# Altium PCB pbc_benelli.PcbDoc
Units mil, origin at the board's own origin, x right, y up, seen from the top; angles counter-clockwise.
Board outline 3325 x 3880 mil, 2 copper layers (Top Layer, Bottom Layer); 45 components, 39 nets, 172 pads, 13 vias.
Unrouted connection lines stored in the file: 1.
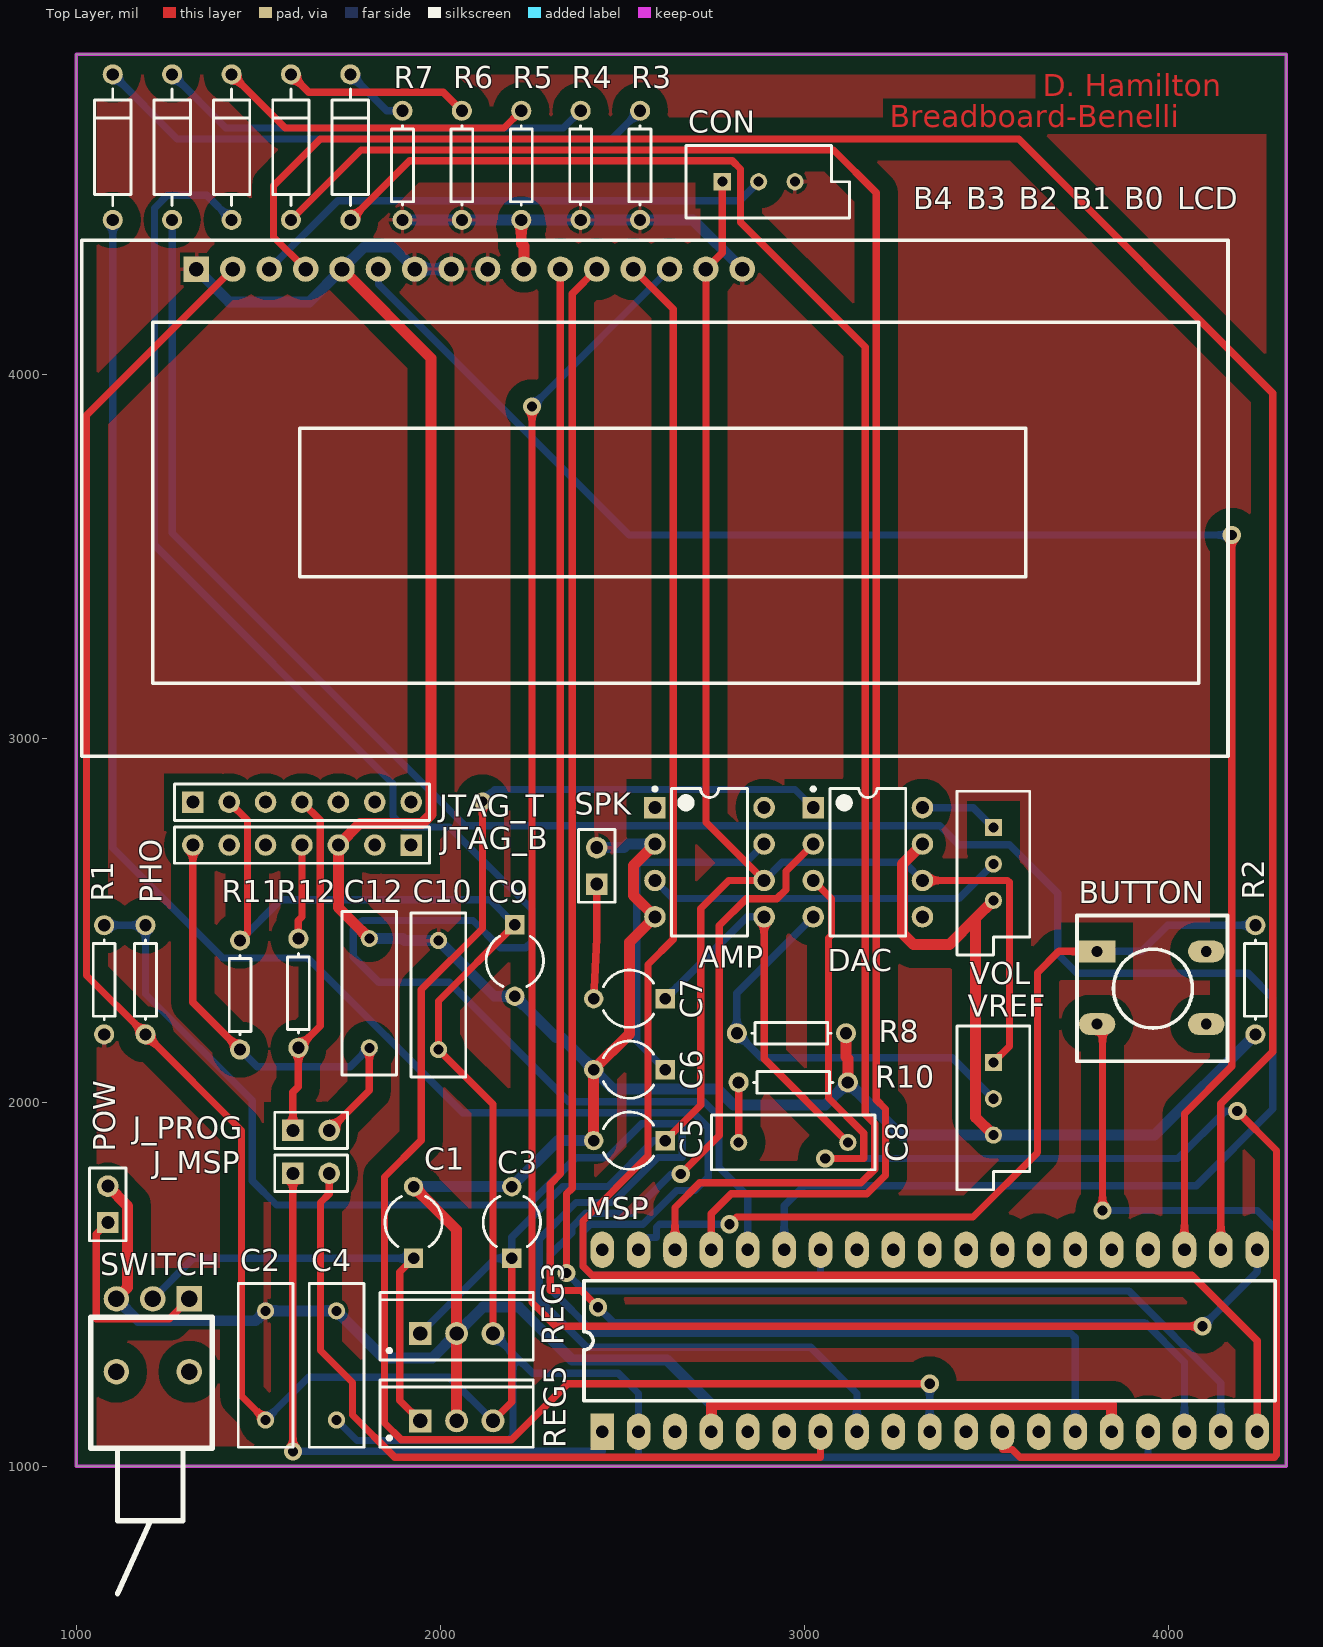
[diagram p0: Top Layer view]
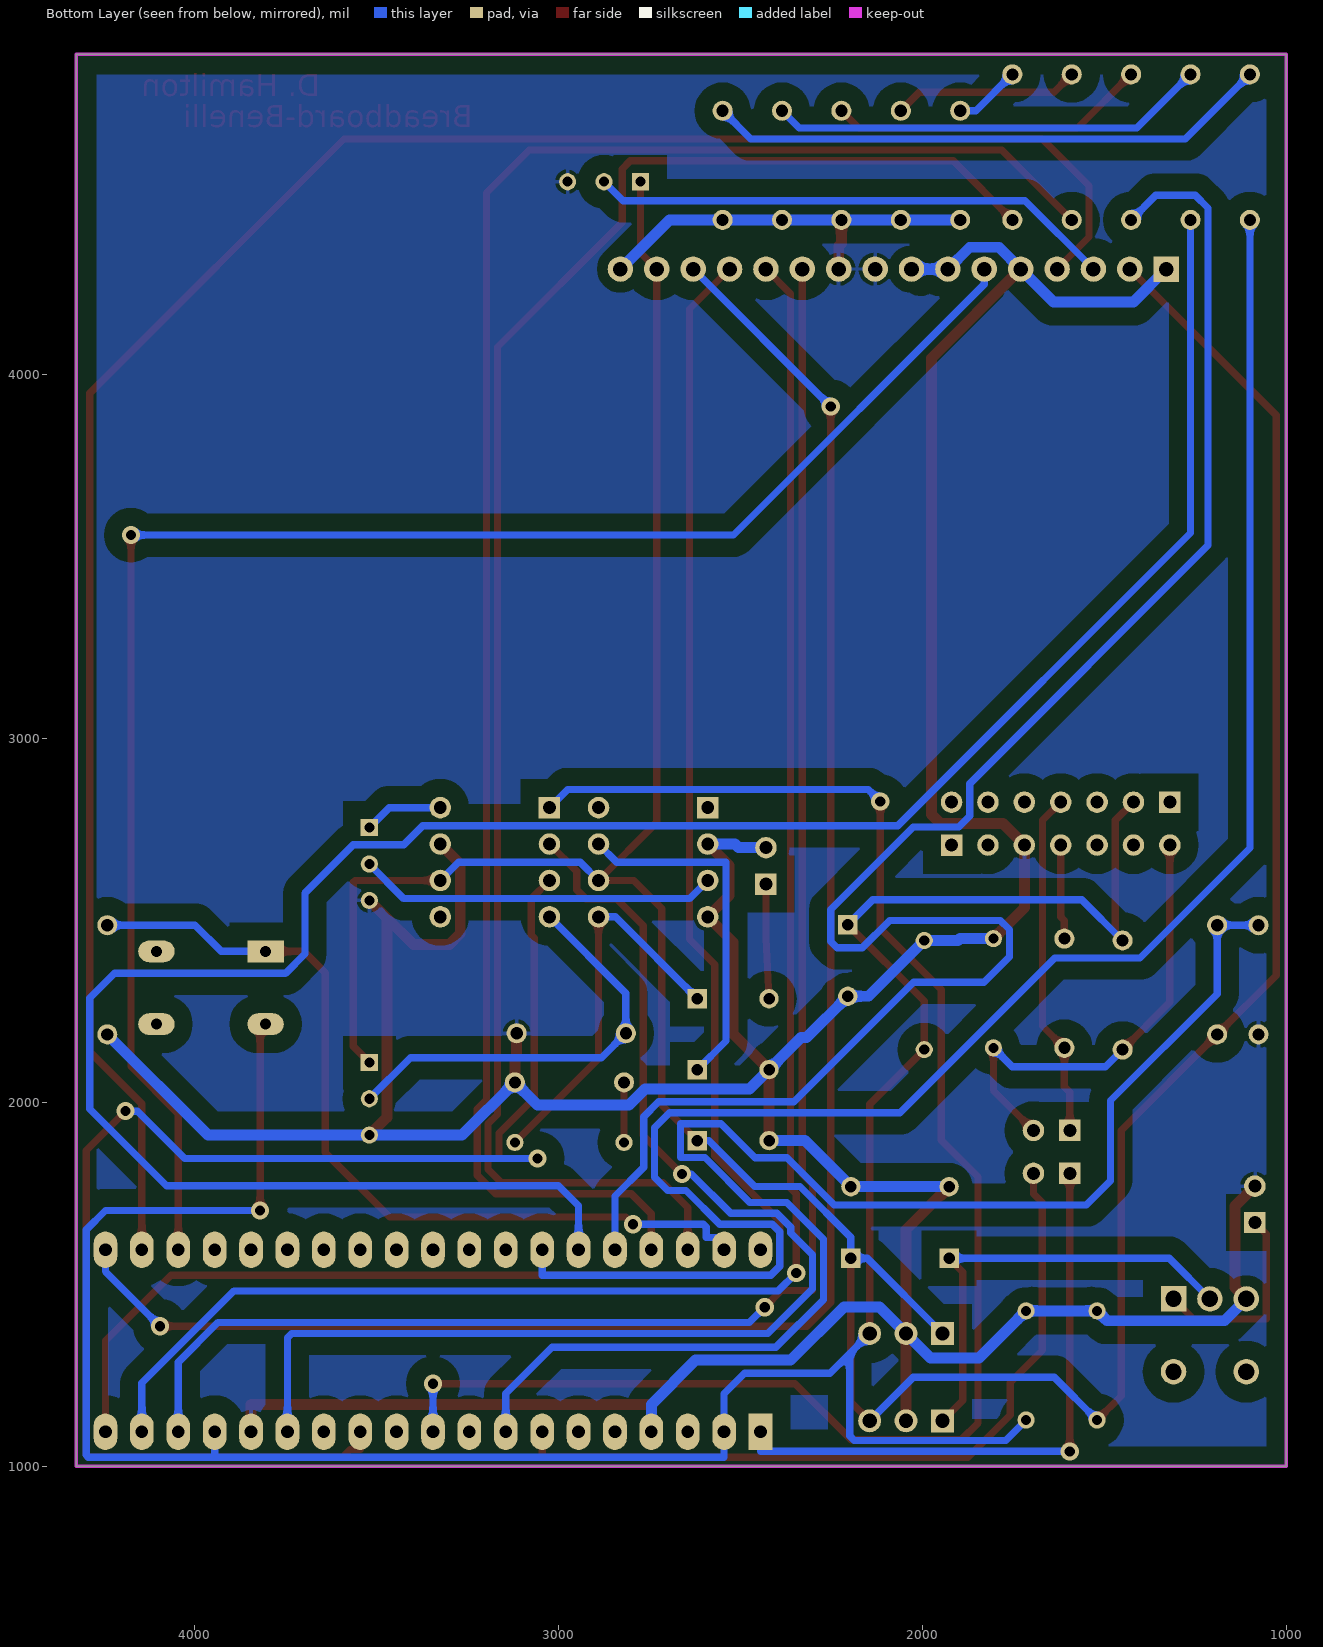
[diagram p1: Bottom Layer view, seen from below]

## Layer stack, top to bottom
Top Solder: solder mask 0.4, Solder Resist, Dk 3.5
Top Layer: signal copper 1.4
Dielectric 1: dielectric 12.6, FR-4, Dk 4.8
Bottom Layer: signal copper 1.4
Bottom Solder: solder mask 0.4, Solder Resist, Dk 3.5

## Board outline
1000,1000 1000,4880 4325,4880 4325,1000

## Design rules (kind name [scope] priority, off if disabled: settings)
Clearance [All] p1: gap=10 ignorepadtopadclearanceinfootprint=FALSE except(0: Arc-Hole Track-Hole SMDPad-Hole THPad-Hole Via-Hole Fill-Hole Poly-Hole Region-Hole Text-Hole; 50: Arc-Fill Arc-Poly Arc-Region Track-Fill Track-Poly Track-Region SMDPad-Fill SMDPad-Poly SMDPad-Region THPad-Fill THPad-Poly THPad-Region Via-Fill Via-Poly Via-Region Fill-Fill Fill-Poly Fill-Region Poly-Poly Poly-Region Region-Region)
PolygonConnect [All] p1: connectstyle=Relief reliefconductorwidth=10 reliefentries=4 polygonreliefangle="90 Angle" airgapwidth=10
RoutingVias [All] p1: holewidth=28 width=50 viastyle="Through Hole" minholewidth=28 minwidth=50 maxholewidth=28 maxwidth=50
SolderMaskExpansion [All] p1: expansion=4
Width "Schematic Width Constraint" [InNet('GND')] p1: maxlimit=30 minlimit=30 preferedwidth=30 minimp=50.000000 maximp=50.000000 favimp=50.000000
Width [All] p2: maxlimit=20 minlimit=20 preferedwidth=20 minimp=50.000000 maximp=50.000000 favimp=50.000000
30 further rules are at their usual default settings.

## Components (designator, comment, footprint, x,y, rotation, side; value= is the part's Value field where it differs from the comment)
AMP "LM386N-1" DIP-8 2740,2660 r0 top
B0 "LED1" DIODE-0.4 1752.92,4625 r90 top
B1 "LED1" DIODE-0.4 1589.69,4625 r90 top
B2 "LED1" DIODE-0.4 1426.46,4625 r90 top
B3 "LED1" DIODE-0.4 1263.23,4625 r90 top
B4 "LED1" DIODE-0.4 1100,4625 r90 top
BUTTON "SW-PB" "SW PB" 3805,2415 r0 top
C1 "Cap Pol2" CAPR5-4X5 1926.62,1670 r90 top value=33uF
C2 "Cap" RAD-0.3 1520,1277.17 r270 top value=.33uF
C3 "Cap Pol2" CAPR5-4X5 2196.62,1670 r90 top value=33uF
C4 "Cap" RAD-0.3 1715,1277.17 r270 top value=.33uF
C5 "Cap Pol2" CAPR5-4X5 2520,1895 r180 top value=100uF
C6 "Cap Pol2" CAPR5-4X5 2520,2090 r180 top value=100uF
C7 "Cap Pol2" CAPR5-4X5 2520,2285 r180 top value=220uF
C8 "Cap" RAD-0.3 2970,1890 r0 top value=100nF
C9 "Cap Pol2" CAPR5-4X5 2205,2390 r270 top value="10 uF"
C10 "Cap" RAD-0.3 1995,2295 r90 top value=".1 uF"
C12 "Cap" RAD-0.3 1805,2300 r90 top value=2.2nF
CON "RPot_3" VR5 2875,4530 r0 top value=10K
DAC "LT1661" DIP-8 3175,2660 r0 top
J_MSP "Header 2" HDR1X2 1595,1805 r0 top
J_PROG "Header 2" HDR1X2 1595,1922.88 r0 top
JTAG_B "Header 7" HDR1X7 1920,2707.12 r180 top
JTAG_T "Header 7" HDR1X7 1320,2825 r0 top
LCD "LCD 44780" "OLED 16x2" 1330,4290 r0 top
MSP "MSP430F2272-DA38" DIP38 2445,1095 r90 top
PHO "Res1" AXIAL-0.3 1190,2336.87 r90 top
POW "Header 2" HDR1X2 1086.44,1669.94 r90 top
R1 "Res1" AXIAL-0.3 1076.46,2336.87 r90 top value=1K
R2 "Res1" AXIAL-0.3 4240,2336.87 r270 top value=100
R3 "Res1" AXIAL-0.3 2549.06,4575 r270 top value=910
R4 "Res1" AXIAL-0.3 2385.84,4575 r270 top value=910
R5 "Res1" AXIAL-0.3 2222.61,4575 r270 top value=910
R6 "Res1" AXIAL-0.3 2059.38,4575 r270 top value=910
R7 "Res1" AXIAL-0.3 1896.15,4575 r270 top value=910
R8 "Res1" AXIAL-0.3 2965,2190 r180 top value=1K
R10 "Res1" AXIAL-0.3 2970,2055 r180 top value=15
R11 "Res1" AXIAL-0.3 1450,2295 r270 top value=47K
R12 "Res1" AXIAL-0.3 1610,2300 r90 top value=330
REG3 "LM3940-3.3" T03B 2045,1365 r0 top
REG5 "LM2940-5.0" T03B 2045,1125 r0 top
SPK "Header 2" HDR1X2 2430,2600 r90 top
SWITCH "SW-SPDT" "SW DPST jameco" 1212.36,1461.89 r0 top
VOL "RPot_3" VR5 3520,2655 r270 top value=10K
VREF "RPot_3" VR5 3520,2010 r270 top value=10K

## Footprints (in the part's own frame and the unit in brackets; to place one, negate y for a bottom-side part, rotate by r counter-clockwise, add the part's x,y. Pads: shape width x height; smd on the part's side, far side on the other; paste and mask are expansions set on the pad)
AXIAL-0.3 [mm] "Axial Device, Thru-Hole; 2 Leads; 0.3 in Pin Spacing"
  round 1.4 hole 0.85: 1(-3.81,0) 2(3.81,0)
  silkscreen extent -2.77,-0.76 2.77,0.76
CAPR5-4X5 [mm] "Capacitor; 2 Leads"
  rect 1.35x1.35 hole 0.8: 1(-2.5,0)
  round 1.35 hole 0.8: 2(2.5,0)
  silkscreen extent -1.69,-2 1.82,2
DIODE-0.4 [mm] "Diode, Thru-Hole; 2 Leads; 0.4 in Pin Spacing"
  round 1.4 hole 0.85: 1(-5.08,0) 2(5.08,0)
  silkscreen extent -4.06,-1.27 4.06,1.27
DIP38 [mil]
  rect 100x65 hole 35: 1(0,0)
  oval 100x65 hole 35: 2(0,-100) 3(0,-200) 4(0,-300) 5(0,-400) 6(0,-500) 7(0,-600) 8(0,-700) 9(0,-800) 10(0,-900) 11(0,-1000) 12(0,-1100) 13(0,-1200) 14(0,-1300) 15(0,-1400) 16(0,-1500) 17(0,-1600) 18(0,-1700) 19(0,-1800) 20(500,-1800) 21(500,-1700) 22(500,-1600) 23(500,-1500) 24(500,-1400) 25(500,-1300) 26(500,-1200) 27(500,-1100) 28(500,-1000) 29(500,-900) 30(500,-800) 31(500,-700) 32(500,-600) 33(500,-500) 34(500,-400) 35(500,-300) 36(500,-200) 37(500,-100) 38(500,0)
  silkscreen extent 85,-1850 415,50
DIP-8 [mm] "DIP; 8 Leads; Row Spacing 7.62 mm; Pitch 2.54 mm"
  rect 1.5x1.5 hole 0.9: 1(-3.81,3.81)
  round 1.5 hole 0.9: 2(-3.81,1.27) 3(-3.81,-1.27) 4(-3.81,-3.81) 5(3.81,-3.81) 6(3.81,-1.27) 7(3.81,1.27) 8(3.81,3.81)
  silkscreen extent -3.93,-5.15 2.65,5.23, body extent -3.6,-5.15 3.6,5.15, height 5.08
HDR1X2 [mm] "Connector; Header; 2 Position"
  rect 1.5x1.5 hole 0.9: 1(0,0)
  round 1.5 hole 0.9: 2(2.54,0)
  silkscreen extent -1.27,-1.27 3.81,1.27
HDR1X7 [mm] "Connector; Header; 7 Position"
  rect 1.5x1.5 hole 0.9: 1(0,0)
  round 1.5 hole 0.9: 2(2.54,0) 3(5.08,0) 4(7.62,0) 5(10.16,0) 6(12.7,0) 7(15.24,0)
  silkscreen extent -1.27,-1.27 16.51,1.27
"OLED 16x2" [mil]
  rect 70x70 hole 40: 1(0,0)
  round 70 hole 40: 2(100,0) 3(200,0) 4(300,0) 5(400,0) 6(500,0) 7(600,0) 8(700,0) 9(800,0) 10(900,0) 11(1000,0) 12(1100,0) 13(1200,0) 14(1300,0) 15(1400,0) 16(1500,0)
  silkscreen extent -315,-1339 2835,79
RAD-0.3 [mm] "Radial Cap, Thru-Hole; 2 Leads; 0.3 in Pin Spacing"
  round 1.2 hole 0.7: 1(-3.81,0) 2(3.81,0)
  silkscreen extent -5.72,-1.91 5.71,1.91
"SW DPST jameco" [mil]
  rect 70x70 hole 45: 1(97.64,-1.89)
  round 70 hole 45: 2(-2.36,-1.89) 3(-102.36,-1.89) 4(-102.36,-201.89) 5(97.64,-201.89)
  silkscreen extent -172,-812 162,-52
"SW PB" [mil]
  rect 100x60 hole 30: 1(0,0)
  oval 100x60 hole 30: 2(0,-200) 3(300,-200) 4(300,0)
  silkscreen extent -55,-302 358,98
T03B [mm]
  rect 1.6x1.6 hole 1: 1(-2.54,0)
  round 1.6 hole 1: 2(0,0) 3(2.54,0)
  silkscreen extent -5.35,-1.85 5.35,2.85, body extent -5.4,-1.9 5.4,2.9, height 19.4
VR5 [mm] "Thru-Hole; 3 Leads"
  rect 1.2x1.2 hole 0.7: 1(-2.54,0)
  round 1.2 hole 0.7: 2(0,0) 3(2.54,0)
  silkscreen extent -5.08,-2.54 6.35,2.54

## Part data
AMP: "Low-Voltage Audio Power Amplifier", PackageDocument=Sep-1997, DatasheetDocument=Sep-1997, PackageReference=N08E, Published=15-Apr-2002, Publisher="Altium Limited"
B0 B1 B2 B3 B4: "Typical RED GaAs LED", LatestRevisionDate=08-Jul-2005, LatestRevisionNote="Mech Layer 1 removed.", PackageDescription="LED; 2 Leads", PackageReference=LED-1, Published=8-Jun-2000, Publisher="Altium Limited"
BUTTON: "DIGIKEY SW400-ND", LatestRevisionDate=17-Jul-2002, LatestRevisionNote="Re-released for DXP Platform.", Published=24-Mar-1999, Publisher="Altium Limited"
C1 C3 C5 C6 C7 C9: "Polarized Capacitor (Axial)", LatestRevisionDate=17-Jul-2002, LatestRevisionNote="Re-released for DXP Platform.", PackageDescription="Polarized Capacitor; 2 Leads", PackageReference=POLAR0.8, Published=8-Jun-2000, Publisher="Altium Limited"
C2 C4 C8 C10 C12: "Capacitor", LatestRevisionDate=17-Jul-2002, LatestRevisionNote="Re-released for DXP Platform.", PackageDescription="Radial Cap, Thru-Hole; 2 Leads; 0.3 in Pin Spacing", PackageReference=RAD-0.3, Published=8-Jun-2000, Publisher="Altium Limited"
CON VOL VREF: library part RPot, "Potentiometer", LatestRevisionDate=17-Jul-2002, LatestRevisionNote="Re-released for DXP Platform.", Published=8-Jun-2000, Publisher="Altium Limited", Set Position=0.5, Sim Note="Enter the Resistance value and the set point into parameter fields."
J_MSP J_PROG POW SPK: "Header, 2-Pin", LatestRevisionDate=17-Jul-2002, LatestRevisionNote="Re-released for DXP Platform.", Publisher="Altium Limited"
JTAG_B JTAG_T: "Header, 7-Pin", LatestRevisionDate=17-Jul-2002, LatestRevisionNote="Re-released for DXP Platform.", Publisher="Altium Limited"
MSP: library part MSP430F22x2-DA38, Supplier Part Number 1=296-21456-1-ND, Supplier 1=Digi-Key
PHO R1 R2 R3 R4 R5 R6 R7 R8 R10 R11 R12: "Resistor", LatestRevisionDate=17-Jul-2002, LatestRevisionNote="Re-released for DXP Platform.", PackageDescription="Axial Device, Thru-Hole; 2 Leads; 0.3 in Pin Spacing", PackageReference=AXIAL-0.3, Published=8-Jun-2000, Publisher="Altium Limited"
REG3 REG5: library part LM2940CT-5.0, "1A Low Dropout Regulator, 3-pin TO-220", Manufacturer="National Semiconductor", PackageTopMarking="NSUZXYTTE#*LM2940CT*-5.0 P+", PartNumber=LM2940CT-3.3, PowerWise=N, ComponentLink1Description="Manufacturer URL", ComponentLink1URL=http://www.national.com/, ComponentLink2Description="LM2940C Datasheet", ComponentLink2URL=http://www.national.com/ds/LM/LM2940C.pdf, ComponentLink3Description="LM2940C Web Page", ComponentLink3URL=http://www.national.com/pf/LM/LM2940C.html, ComponentLink4Description="T03B Package Page", ComponentLink4URL=http://www.national.com/packaging/folders/t03b.html, CompType="LDO IC", DatasheetVersion=Jan-2007, High-Reliability=Y, PackageDescription="TO-220, Molded, 3 Lead, Straight", PackageReference=T03B, PackageVersion="revL, Jan-1992", PinCount=3, RoHS=N
SWITCH: "SPDT Subminiature Toggle Switch, Right Angle Mounting, Vertical Actuation", ComponentLink1Description="Manufacturer Link", ComponentLink1URL=http://www.apem.com, DatasheetVersion=05-Dec-2000, LatestRevisionDate=17-Dec-2003, LatestRevisionNote="Schematic revised, PCB Footprint replaced.", PackageDescription="Switch; 4 Leads", PackageReference=TL36WW15050, Published=24-Mar-1999, Publisher="Altium Limited"

## Via types
v1: diameter 50, hole 28, Top Layer to Bottom Layer, 13 vias

## Nets (pads, with @x,y where several pads share a name; then routed paths per layer and width w, separated by ;. In a path a pad name is that pad's centre, name@x,y a point inside that pad or via, vN(x,y) a via of type N, cw(c..) or ccw(c..) an arc to the next point about the centre after c; other vN are vias at no path point)
3V3: BUTTON.2 C4.2 C9.1 C10.1 JTAG_T.2 MSP.2 MSP.16 R11.1 REG3.3 | length 7365.8
  Top Layer w20: JTAG_T.2 1470,2775 1470,2465 R11.1 ; REG3.3 2145,1995 C10.1 1995,2278.43 C9.1 ; BUTTON.2 3820,2215 v1(3820,1703)
  Bottom Layer w20: R11.1 1562,2557 2136.43,2557 C9.1 ; C4.2 1771.17,1071 2187,1071 2200,1084 2200,1310 ; REG3.3 2200,1310 ; v1(3820,1703) 4245,1703 4298,1650 4298,1031 4292,1025 3945,1025 ; MSP.16 3945,1025 ; 2200,1310 2254,1256 2489,1256 2545,1200 MSP.2 2545,1025 3945,1025
+5V: AMP.6 C2.2 C3.1 C5.1 CON.1 DAC.6 LCD.2 LCD.15 PHO.1 REG3.1 REG5.3 VREF.1 | length 9771.2
  Top Layer w20: LCD.2 1028,3888 1028,2348.87 PHO.1 1454,1922.87 1454,1193.17 C2.2 ; REG5.3 2196.62,1176.62 C3.1 ; C5.1 2716,1992.57 2716,2532.9 2793.1,2610 AMP.6 2730,2770 LCD.15 2775,4335 CON.1 ; DAC.6 3559,2610 3564,2605 3564,2154 VREF.1
  Bottom Layer w20: C2.2 1637.83,1245 2025,1245 REG5.3 ; REG3.1 2151.57,1571.57 C3.1 2196.62,1629.13 2336.51,1769.01 2461.01,1769.01 2587,1895 C5.1 ; AMP.6 2940,2660 3275,2660 DAC.6
+9V: POW.1 SWITCH.1 | length 555.7
  Top Layer w20: POW.1 1055,1638.5 1055,1405 1255,1405 SWITCH.1
GND: AMP.2 AMP.4 C1.2 C2.1 C3.2 C4.1 C5.2 C6.2 C9.2 C10.2 C12.2 CON.3 DAC.7 JTAG_B.3 LCD.1 LCD.5 LCD.7 LCD.8 LCD.9 LCD.10 LCD.16 MSP.4 MSP.15 POW.2 R1.1 R2.2 R3.2 R4.2 R5.2 R6.2 R7.2 R8.1 R10.1 REG3.2 REG5.2 SPK.2 SWITCH.3 VOL.3 VREF.3 | length 14195.7
  Top Layer w30: POW.2 1141,1715.38 1141,1491 SWITCH.3 ; LCD.5 1975,4045 1975,2791 1950,2766 1778.88,2766 JTAG_B.3 1720,2535 C12.2 ; C1.2 2045,1650.05 REG3.2 REG5.2 ; R5.2 2222.61,4360.39 2230,4353 LCD.10 ; C5.2 C6.2 2520,2188.43 2520,2440 AMP.4 2531,2569 2531,2651 AMP.2 ; MSP.4 2745,1170 3845,1170 MSP.15 ; R8.1 3115,2125 3120,2120 R10.1 ; DAC.7 3270,2655 3270,2464 3300,2434 3399,2434 3471,2506 ; VREF.3 3471,1959 3471,2506 ; VOL.3 3471,2506
  Bottom Layer w30: SWITCH.3 1170,1400 1492.83,1400 C2.1 C4.1 1844.17,1298 1978,1298 REG3.2 2118,1438 2215.83,1438 2362.02,1291.82 2623.18,1291.82 2745,1170 MSP.4 ; LCD.1 1420,4200 1640,4200 LCD.5 1790,4350 1870,4350 LCD.7 LCD.8 ; C12.2 1897,2450 1902,2445 C10.2 2148.43,2291.57 C9.2 2318.21,2178.36 2333.21,2178.36 C6.2 2475,2036.58 2762.42,2036.58 2806,1993 3058,1993 R10.1 3265,1910 VREF.3 3963.13,1910 R2.2 ; R7.2 R6.2 R5.2 R4.2 R3.2 2695,4425 LCD.16 ; C1.2 C3.2 2323.2,1895 C5.2 ; SPK.2 2505,2700 2515,2710 AMP.2
NetAMP_3: AMP.3 VOL.2 | length 990.1
  Bottom Layer w20: AMP.3 2640,2560 3425,2560 VOL.2
NetAMP_5: AMP.5 C7.1 C8.2 | length 1080
  Top Layer w20: AMP.5 2890,2120 C8.2
  Bottom Layer w20: C7.1 2843.43,2510 AMP.5
NetAMP_7: AMP.7 C6.1 | length 973.2
  Bottom Layer w20: C6.1 2540,2168.43 2540,2660 2840,2660 AMP.7
NetB0_1: B0.1 MSP.36 | length 4758.4
  Top Layer w20: B0.1 1915.36,4587.44 2802.56,4587.44 2825,4565 2825,4419 3168,4076 3168,1966.94 3193.62,1941.32 3193.62,1816.38 3156.45,1779.2 2713.02,1779.2 2645,1711.18 MSP.36
NetB0_2: B0.2 R7.1 | length 184.7
  Bottom Layer w20: B0.2 1852.92,4725 R7.1
NetB1_1: B1.1 MSP.35 | length 5068.8
  Top Layer w20: B1.1 1782.13,4617.44 3080.56,4617.44 3198,4500 3198,2007.31 3223.62,1981.69 3223.62,1800 3172.62,1749 2800,1749 2745,1694 MSP.35
NetB1_2: B1.2 R6.1 | length 511.1
  Top Layer w20: B1.2 1638.69,4776 2008.38,4776 R6.1
NetB2_1: B2.1 MSP.34 | length 4972.7
  Bottom Layer w20: B2.1 1358.46,4493 1250,4493 1215,4458 1215,3531 1870,2876 1870,2787 1900,2757 2025,2757 2252,2530 2252,2442 2235,2425 2165,2425 2090,2500 1786,2500 1761,2475 1761,2400 1831,2330 2024.37,2330 2352.79,2001.58 2725,2001.58 2766.09,1960.49 2766.09,1821.91 2845,1743 MSP.34
NetB2_2: B2.2 R5.1 | length 877
  Top Layer w20: B2.2 1574.02,4677.44 2175.05,4677.44 R5.1
NetB3_1: B3.1 MSP.33 | length 6391.3
  Bottom Layer w20: B3.1 1263.23,3564.77 2068,2760 3373,2760 3425,2708 3564,2708 3697,2575 3697,2408 3750,2355 4220,2355 4288,2287 4288,1981.88 4077.12,1771 3000,1771 2945,1716 MSP.33
NetB3_2: B3.2 R4.1 | length 1203.4
  Bottom Layer w20: B3.2 1410.79,4677.44 2338.28,4677.44 R4.1
NetB4_1: B4.1 MSP.32 | length 5050.7
  Bottom Layer w20: B4.1 1100,2699 1402,2397 1636,2397 2061.42,1971.58 2695,1971.58 2736.09,1930.49 2736.09,1794.09 2700,1758 2649.95,1758 2556.95,1665 2412.5,1665 2392,1644.5 2392,1550 2417,1525 3045,1525 MSP.32
NetB4_2: B4.2 R3.1 | length 1554.7
  Bottom Layer w20: B4.2 1277.56,4647.44 2471.5,4647.44 R3.1
NetBUTTON_1: BUTTON.1 MSP.37 R2.1 | length 2390
  Top Layer w20: v1(2795,1665) 2815,1685 3464,1685 3641,1862 3641,2356 3700,2415 BUTTON.1
  Bottom Layer w20: MSP.37 2545,1629 2594,1629 2594,1656.82 2602.18,1665 v1(2795,1665) ; BUTTON.1 3927,2415 3998.87,2486.87 R2.1
NetC1_1: C1.1 REG5.1 SWITCH.2 | length 1248.2
  Top Layer w20: C1.1 1889,1533.95 1889,1181 REG5.1
  Bottom Layer w20: SWITCH.2 1321.57,1571.57 C1.1
NetC7_2: C7.2 SPK.1 | length 315.2
  Top Layer w20: C7.2 2430,2451.43 SPK.1
NetC8_1: C8.1 R10.2 | length 165
  Top Layer w20: C8.1 R10.2
NetCON_2: CON.2 LCD.3 | length 1444.4
  Bottom Layer w20: LCD.3 1718,4478 2823,4478 CON.2
NetDAC_4: DAC.4 R8.2 VREF.2 | length 1186.5
  Bottom Layer w20: DAC.4 2815,2300 R8.2 2882,2123 3407,2123 VREF.2
NetDAC_8: DAC.8 VOL.1 | length 217.8
  Bottom Layer w20: DAC.8 3465,2810 VOL.1
NetJTAG_B_4: JTAG_B.4 R12.2 | length 261.3
  Top Layer w20: R12.2 1610,2500 1620,2510 JTAG_B.4
NetLCD_4: LCD.4 MSP.21 | length 5767.2
  Top Layer w20: LCD.4 1542,4378 1542,4519 1670.44,4647.44 3589.56,4647.44 4288,3949 4288,2139 4145,1996 MSP.21
NetLCD_6: LCD.6 MSP.22 | length 4690.2
  Top Layer w20: MSP.22 4045,1969 4175,2099 v1(4175,3559)
  Bottom Layer w20: LCD.6 1830,4248 2519,3559 v1(4175,3559)
NetLCD_11: LCD.11 MSP.17 | length 4834.3
  Top Layer w20: LCD.11 2330,1803 2302,1775 2302,1482.82 2387.62,1482.82 v1(2433.44,1437)
  Bottom Layer w20: v1(2433.44,1437) 2475,1395.44 3935.56,1395.44 4045,1286 MSP.17
NetLCD_12: LCD.12 MSP.18 | length 4850.5
  Top Layer w20: v1(2347,1531) 2347,1748.8 2362.5,1764.3 2362.5,4222.5 LCD.12
  Bottom Layer w20: v1(2347,1531) 2396,1482 3892,1482 4145,1229 MSP.18
NetLCD_13: LCD.13 MSP.19 | length 5076.2
  Top Layer w20: LCD.13 2640,4180 2640,2448 2571,2379 2571,1853 2392,1674 2392,1550 2417,1525 4065,1525 4245,1345 MSP.19
NetLCD_14: LCD.14 MSP.20 | length 5138.6
  Top Layer w20: v1(2252,3912) 2252,1450 2317,1385 v1(4095,1385)
  Bottom Layer w20: v1(2252,3912) LCD.14 ; v1(4095,1385) 4245,1535 MSP.20
NetMSP_8: MSP.8 PHO.2 R1.2 | length 4069.2
  Bottom Layer w20: R1.2 PHO.2 1190,2298 1483,2005 1483,1785 1550,1718 2242,1718 2372,1848 2460,1848 2553.58,1941.58 2665,1941.58 2665,1848.42 2597.72,1848.42 2474.29,1725 2372.99,1725 2272,1624.01 2272,1457.89 2402.89,1327 3018,1327 3145,1200 MSP.8
RST_MSP: J_MSP.2 MSP.7 | length 2114.4
  Top Layer w20: J_MSP.2 1695,1749 1671,1725 1671,1318 1759,1230 1759,1141 1875,1025 3045,1025 MSP.7
RST_PROG: C12.1 J_PROG.2 JTAG_B.7 R11.2 | length 1284.7
  Top Layer w20: JTAG_B.7 1320,2275 R11.2 ; J_PROG.2 1805,2032.88 C12.1
  Bottom Layer w20: R11.2 1497,2098 1753,2098 C12.1
SPI_CLK: DAC.2 MSP.14 | length 3417.5
  Top Layer w20: v1(2661,1803) 2767,1909 2767,2486.06 2840.47,2559.53 2925,2559.53 2950,2584.53 2950,2635 DAC.2
  Bottom Layer w20: v1(2661,1803) 2635,1803 2527,1695 2400.07,1695 2362,1656.93 2362,1641 2302,1581 2302,1488 2425,1365 3733,1365 3745,1353 MSP.14
SPI_CS: DAC.1 MSP.10 | length 4475.6
  Top Layer w20: v1(2116,2827) 2116,2478 1948,2310 1948,1896 1847,1795 1847,1119 1893,1073 2196,1073 2350,1227 v1(3345,1227)
  Bottom Layer w20: v1(2116,2827) 2149,2860 2975,2860 DAC.1 ; MSP.10 v1(3345,1227)
SPI_MOSI: DAC.3 MSP.12 | length 3922.4
  Top Layer w20: DAC.3 3075,2560 3075,2460 3067,2452 3067,2012 3163.62,1915.38 3163.62,1846 v1(3058,1846) ; MSP.12 3545,1046 3572,1046 3593,1025 4292,1025 4298,1031 4298,1868 v1(4190,1976)
  Bottom Layer w20: v1(3058,1846) 4027,1846 4157,1976 v1(4190,1976)
TEST_MSP: J_MSP.1 MSP.1 | length 1668
  Top Layer w20: v1(1595,1041) J_MSP.1
  Bottom Layer w20: v1(1595,1041) 2445,1041 MSP.1
TEST_PROG: J_PROG.1 JTAG_T.4 R12.1 | length 953.9
  Top Layer w20: J_PROG.1 1595,2028 1610,2043 R12.1 1670,2210 1670,2775 JTAG_T.4
pads on no net: AMP.1 AMP.8 BUTTON.3 BUTTON.4 DAC.5 JTAG_B.1 JTAG_B.2 JTAG_B.5 JTAG_B.6 JTAG_T.1 JTAG_T.3 JTAG_T.5 JTAG_T.6 JTAG_T.7 MSP.3 MSP.5 MSP.6 MSP.9 MSP.11 MSP.13 MSP.23 MSP.24 MSP.25 MSP.26 MSP.27 MSP.28 MSP.29 MSP.30 MSP.31 MSP.38 SWITCH.4 SWITCH.5

## Polygon pours and split planes (outlines as drawn)
GND on Bottom Layer (solid, pour order 0): 1000,4880 1000,1000 4325,1000 4325,4880
GND on Top Layer (solid, pour order 2): 1000,4880 1000,1000 4325,1000 4325,4880

## Keep-outs
Keep-Out Layer:
  the board outline again, w10

## Other copper
Top Layer:
  text "D. Hamilton" at 3655.19,4765 h60
  text "Breadboard-Benelli" at 3235.33,4680 h60